# Altium PCB MS3100_DRV_V0.1.PcbDoc
Units mil, origin at the board's own origin, x right, y up, seen from the top; angles counter-clockwise.
Board outline 3947.04 x 6545.46 mil, 2 copper layers (Top Layer, Bottom Layer); 15 components, 14 nets, 46 pads, 3 vias.
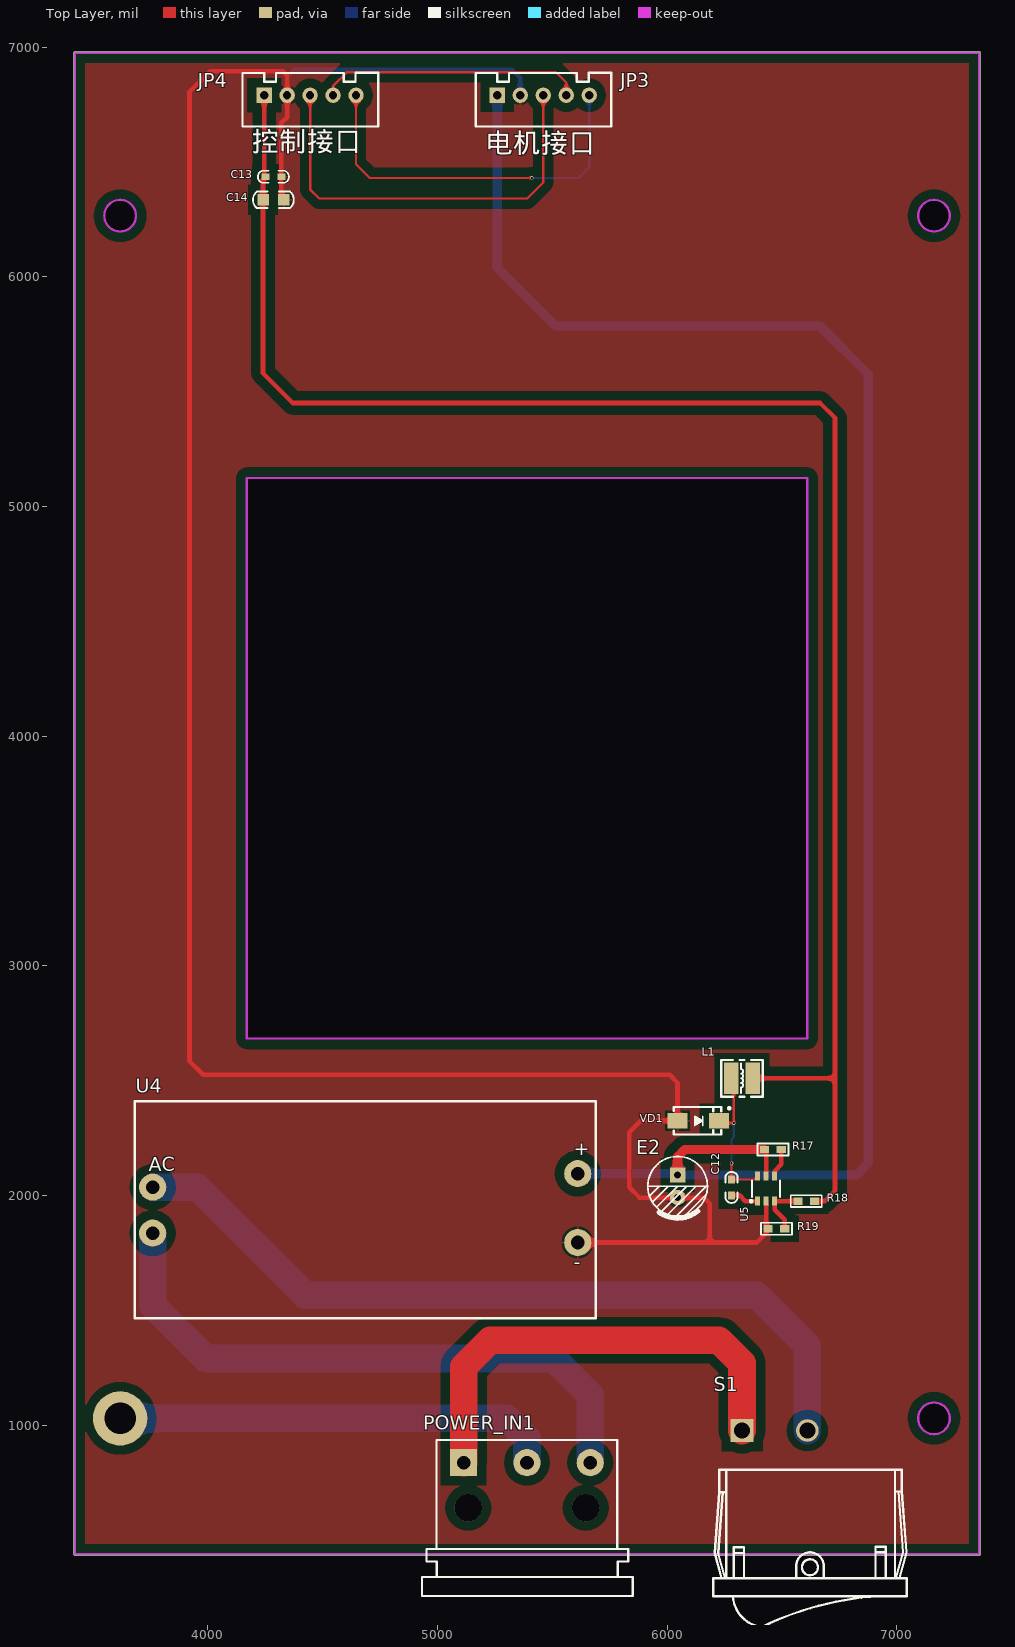
[diagram p0: Top Layer view]
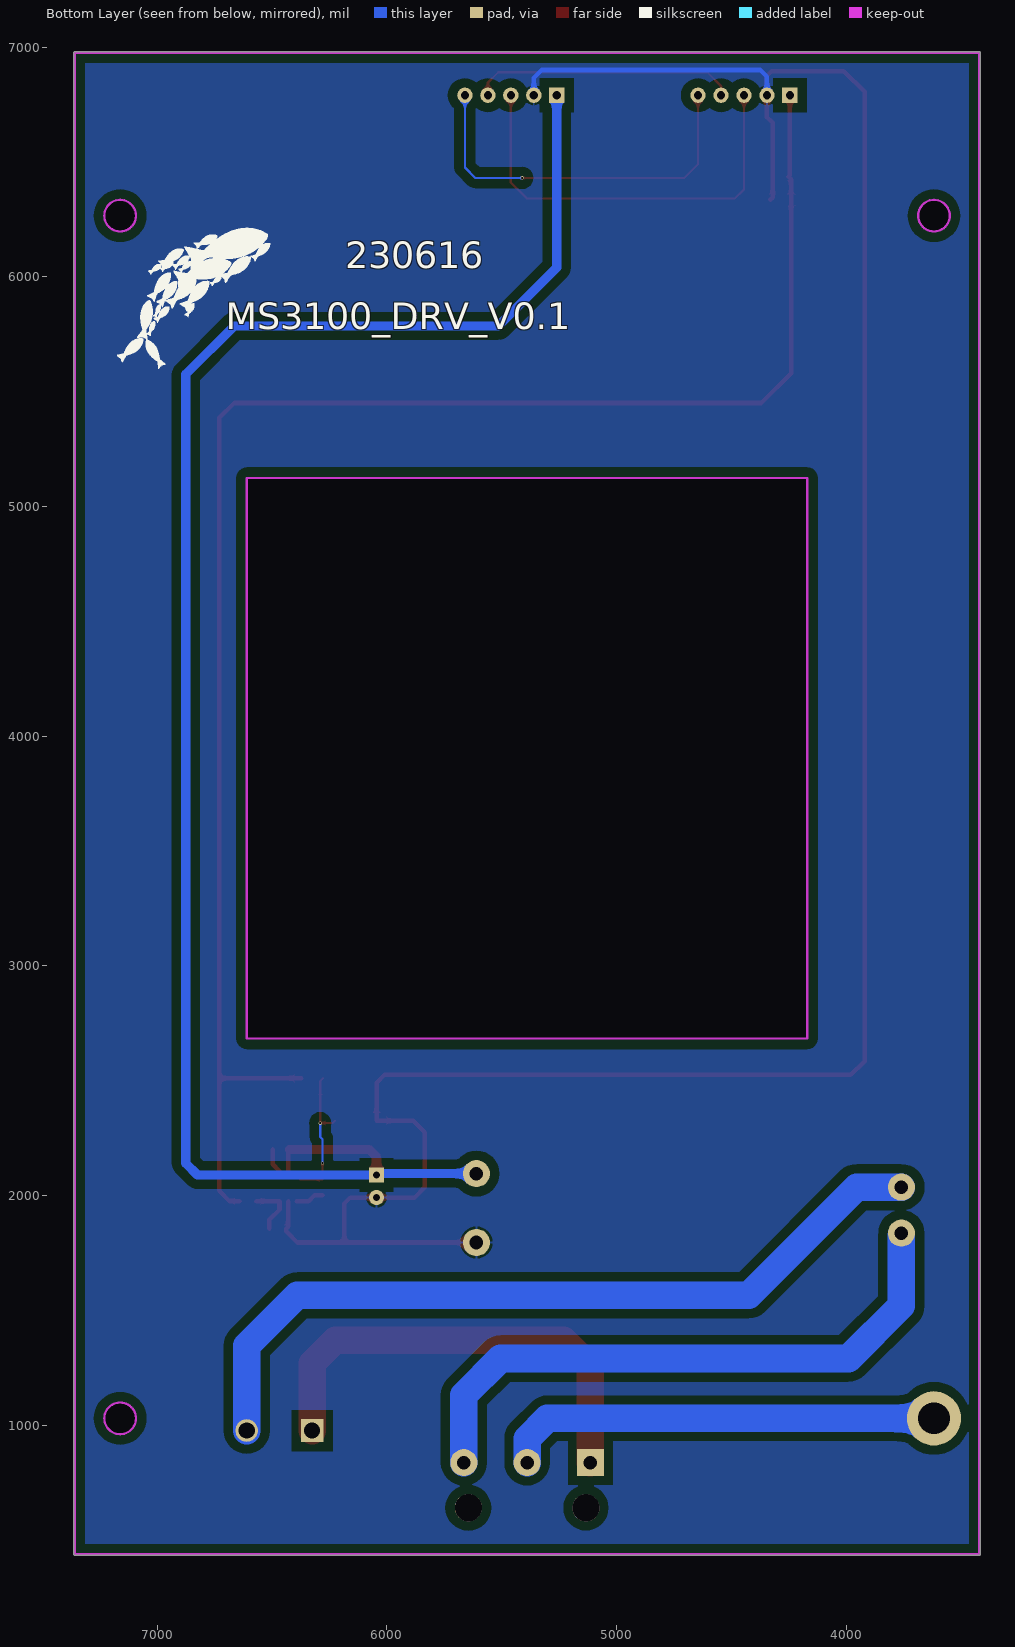
[diagram p1: Bottom Layer view, seen from below]
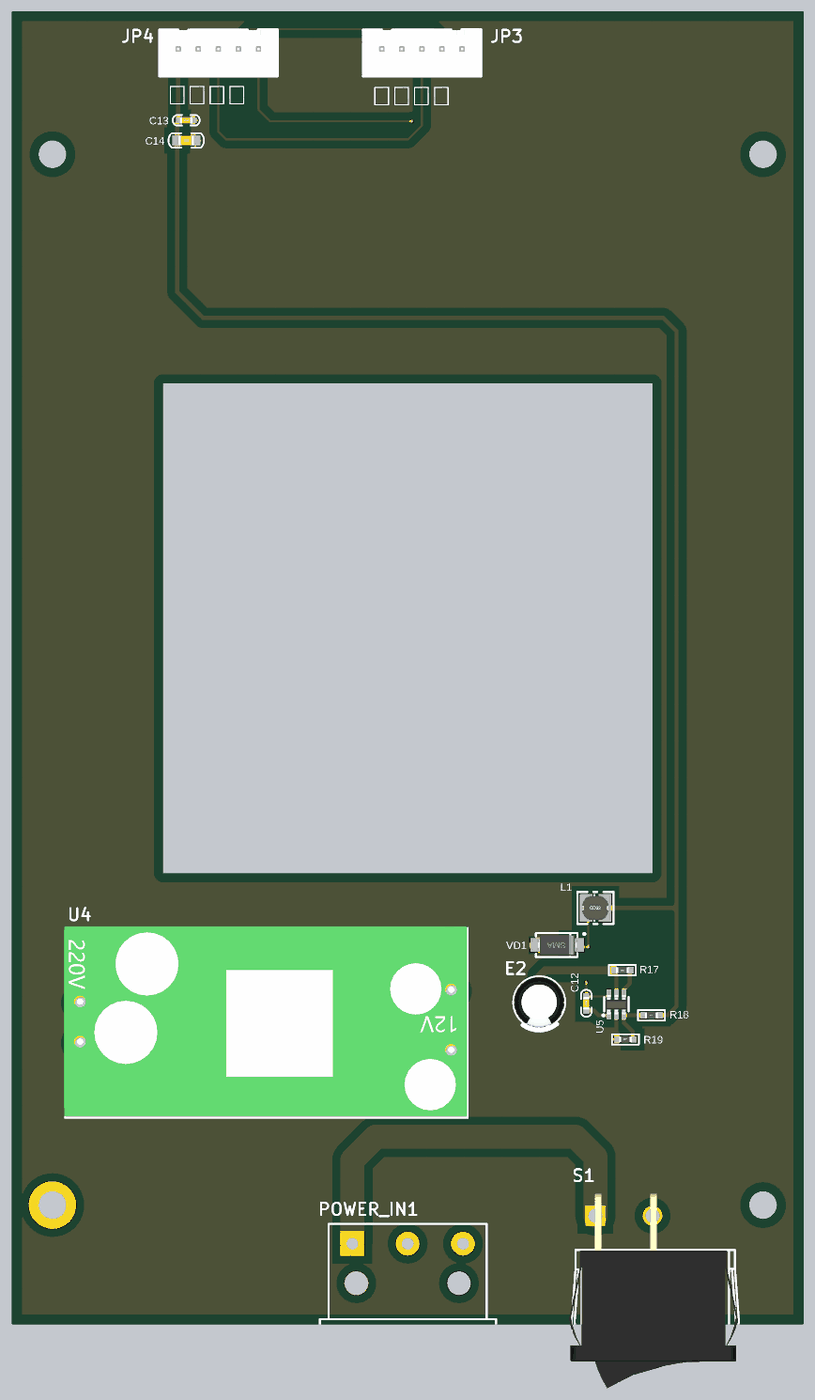
[diagram p2: 3D render of the assembled board from above, using the file's embedded part models]

## Layer stack, top to bottom
Top Solder: solder mask 0.4, Solder Resist, Dk 3.5
Top Layer: signal copper 1.4
Dielectric 1: dielectric 12.6, FR-4, Dk 4.8
Bottom Layer: signal copper 1.4
Bottom Solder: solder mask 0.4, Solder Resist, Dk 3.5

## Board outline
3415.94,438.83 ccw(c3420.95,438.83) 3420.95,433.82 3852.05,433.82 5828.43,433.82 7357.96,433.82 ccw(c7357.96,438.83) 7362.97,438.83 7362.97,6974.27 ccw(c7357.96,6974.27) 7357.96,6979.28 3420.95,6979.28 ccw(c3420.95,6974.27) 3415.94,6974.27
cut-out: 3617.8,6196.71 cw(c3617.8,6265.6) 3548.9,6265.6 cw(c3617.8,6265.6) 3617.8,6334.5 cw(c3617.8,6265.6) 3686.7,6265.6 cw(c3617.8,6265.6)
cut-out: 7092.21,1029.38 ccw(c7161.11,1029.38) 7161.11,960.49 ccw(c7161.11,1029.38) 7230.01,1029.38 ccw(c7161.11,1029.38) 7161.11,1098.28 ccw(c7161.11,1029.38)
cut-out: 7092.21,6265.6 ccw(c7161.11,6265.6) 7161.11,6196.71 ccw(c7161.11,6265.6) 7230.01,6265.6 ccw(c7161.11,6265.6) 7161.11,6334.5 ccw(c7161.11,6265.6)
cut-out: 4168.98,2682.93 6609.93,2682.93 6609.93,5123.87 4168.98,5123.87

## Design rules (kind name [scope] priority, off if disabled: settings)
Clearance [All] p1: gap=10 ignorepadtopadclearanceinfootprint=FALSE
PolygonConnect [All] p1: connectstyle=Relief reliefconductorwidth=10 reliefentries=4 polygonreliefangle="90 Angle" airgapwidth=10
RoutingVias [All] p1: holewidth=28 width=50 viastyle="Through Hole" minholewidth=10 minwidth=10 maxholewidth=28 maxwidth=50
SolderMaskExpansion [All] p1: expansion=4
Width [All] p1: maxlimit=140 minlimit=10 preferedwidth=10
30 further rules are at their usual default settings.

## Components (designator, comment, footprint, x,y, rotation, side; value= is the part's Value field where it differs from the comment)
C12 "0.1uF" "C 0603" 6280,2035 r90 top
C13 "0.1uF" "C 0603" 4285,6435 r180 top
C14 "10uF/16V" "C 0805" 4285,6334.5 r180 top
E2 "220uF/25V" "CAP 2.5*6.3*11.2 - BK" 6045,2040 r270 top
JP3 "HDR-1X5" XH2.54-5P 5260,6790 r0 top locked
JP4 "HDR-1X5" XH2.54-5P 4245,6790 r0 top locked
L1 "4.7uH" CD32 6325.39,2510 r0 top
POWER_IN1 "AC_Power" POWER_M 5113.5,836.85 r0 top locked
R17 "100K" "R 0603" 6460,2200 r180 top
R18 "24K" "R 0603" 6605,1975 r0 top
R19 "7.5K" "R 0603" 6475,1855 r0 top
S1 "SS-12F23" SS11-BBIWJ-R20-R 6200,255 r0 top locked
U4 "AC_To_12V" ACTo12V0.5A 3680.87,1465.08 r0 top
U5 "ME3116AM6G" ME3116AM6G 6430,2030 r90 top
VD1 "SS14" SMA 6135,2325 r0 top

## Footprints (in the part's own frame and the unit in brackets; to place one, negate y for a bottom-side part, rotate by r counter-clockwise, add the part's x,y. Pads: shape width x height; smd on the part's side, far side on the other; paste and mask are expansions set on the pad)
ACTo12V0.5A [mm] "ACת12V-0.5A"
  round 3 hole 1.5: 1(2,14.5) 2(2,9.42) 3(49,16) 4(49,8.38)
  silkscreen extent 0,0 51,24, body extent -0.1,0.19 50.9,24.19, height 16.3
"C 0603" [mil] "无极性贴片电容"
  rect 35x30 smd: 1(-35,0) 2(34,0)
  silkscreen extent -67,-26 67,26, body extent -31,-16 31,16, height 32
"C 0805" [mil] "无极性贴片电容"
  rect 50x50 smd: 1(-45,0) 2(45,0)
  silkscreen extent -89,-36 89,36, body extent -39,-24 39,24, height 20
"CAP 2.5*6.3*11.2 - BK" [mm] "脚距2.5mm直径6.3mm高度11.2mm"
  rect 1.7x1.7 hole 0.8: 1(-1.25,0)
  round 1.7 hole 0.8: 2(1.25,0)
  silkscreen extent -3.3,-3.3 3.56,3.3, body extent -3.15,-3.15 3.16,3.15, height 11.24
CD32 [mm] "3.5*3*2mm（长宽高）"
  rect 1.6x3.5 smd: 1(-1.2,0) 2(1.2,0)
  silkscreen extent -2.29,-2.03 2.29,2.03, body extent -1.71,-1.5 1.71,1.5, height 2.15
ME3116AM6G [mm] "SOT-23-6"
  rect 1x0.55 smd: 1(-1.4,0.95) 2(-1.4,0) 3(-1.4,-0.95) 4(1.4,-0.95) 5(1.4,0) 6(1.4,0.95)
  silkscreen extent -1.52,-1.55 0.9,1.78, body extent -1.27,-1.4 1.16,1.4, height 1.09
POWER_M [mm] "220v电源插座"
  rect 3x3 hole 1.5: 1(0,0)
  round 3 hole 1.5: 2(7,0) 3(14,0)
  round 3 hole 3: 12(0.5,-5)
  round 3 hole 3 unplated: 12(13.5,-5)
  silkscreen extent -4.62,-14.75 18.68,2.5, body extent -4.62,-14.75 18.68,1.91, height 18.22
"R 0603" [mil] "1/10W贴片电阻"
  rect 40x31.5 smd: 1(-36.5,0) 2(36.5,0)
  silkscreen extent -68,-26 68,26, body extent -31,-16 32,16, height 16
SMA [mm] "4.5x2.6*2.2mm（长宽高，不包括引脚）"
  rect 2.2x1.75 smd: 1(-2.3,0) 2(2.3,0)
  silkscreen extent -2.7,-1.52 3.56,1.52, body extent -2.53,-1.3 2.58,1.3, height 2.15
SS11-BBIWJ-R20-R [mm] "船型开关-卧式-2P"
  rect 2.5x2.5 hole 1.8 paste+0 mask+0.051: 2(3.185,18.325)
  round 2.5 hole 1.8 paste+0 mask+0.051: 3(10.415,18.325)
  silkscreen extent 0,-3.4 21.4,14, body extent -0.17,-3.51 21.23,21.09, height 16.8
XH2.54-5P [mm] "接插件，5P"
  rect 1.7x1.7 hole 0.9: 1(0,0)
  round 1.7 hole 0.9: 2(2.54,0) 3(5.08,0) 4(7.62,0) 5(10.16,0)
  silkscreen extent -2.4,-3.45 12.6,2.49, body extent -2.5,-3.3 12.66,2.4, height 7.03

## Part data
C12 C13 C14: library part C, "无极性贴片电容", BOM名称=无极性贴片电容, 学习资源=www.ooocke.com, 版权归属=源创客
E2: library part C-CAP, "直插电解电容", BOM名称=直插电解电容, 学习资源=www.ooocke.com, 版权归属=源创客
JP3 JP4: library part "Header 5", "5P接插件", BOM名称=5P接插件, 学习资源=www.ooocke.com, 版权归属=源创客
L1: library part L, "小功率贴片电感", BOM名称=小功率贴片电感, 学习资源=www.ooocke.com, 版权归属=源创客
POWER_IN1: "AC电源插座"
R17 R18 R19: library part R, "贴片电阻", BOM名称=贴片电阻, 学习资源=www.ooocke.com, 版权归属=源创客
S1: library part SSW-1P, "1路波动开关", BOM名称=波动开关, 学习资源=www.ooocke.com, 版权归属=源创客
U4: "220V转12V降压模块"
U5: "DC-DC电源芯片  24-40V->5V"
VD1: "肖特基二极管"

## Free pads (board coordinates)
  round 236.22 hole 137.8: 2(3617.8,1029.38)

## Via types
v1: diameter 15, hole 10, Top Layer to Bottom Layer, 3 vias

## Nets (pads, with @x,y where several pads share a name; then routed paths per layer and width w, separated by ;. In a path a pad name is that pad's centre, name@x,y a point inside that pad or via, vN(x,y) a via of type N, cw(c..) or ccw(c..) an arc to the next point about the centre after c; other vN are vias at no path point)
3.3V: C13.2 C14.2 JP4.1 L1.2 R18.2 | length 7625.8
  Top Layer w10: JP4.1 JP4.1@4251,6784
  Top Layer w20: JP4.1 4245,6441 C13.2 4240,6424 C14.2 4240,5580 4370,5450 6665,5450 6730,5385 6730,2510 ; L1.2 6730,2510 ; R18.2 6685,1975 6730,2020 6730,2510
12V: E2.1 JP3.1 R17.2 U4.3 U5.5 | length 7869.4
  Top Layer w20: R17.2 6430,2193.5 U5.5
  Top Layer w40: E2.1 6045,2168.5 6076.5,2200 R17.2
  Bottom Layer w40: JP3.1 5260,6040 5515,5785 6665,5785 6875,5575 6875,2140 6824.21,2089.21 E2.1 6039.21,2095 U4.3
DIR: JP3.3 JP4.3 | length 1850.6
  Top Layer w10: JP4.3 4445,6380 4485,6340 5390,6340 5460,6410 JP3.3
EGND: pad.2 POWER_IN1.2 | length 1912
  Bottom Layer w120: pad.2 5300.62,1029.38 5389.09,940.91 POWER_IN1.2
FG: JP3.5 JP4.5 | length 1673.5
  Top Layer w10: JP4.5 4645,6490 4705,6430 v1(5410,6430)
  Bottom Layer w10: v1(5410,6430) 5615,6430 5660,6475 JP3.5
GND: C13.1 C14.1 E2.2 JP3.2 JP4.2 R19.1 U4.4 U5.2 VD1.1 | length 10774.2
  Top Layer w20: C14.1 4320,6344.5 C13.1 4320,6670 4345,6695 JP4.2 4345,6875 4325,6895 4010,6895 3920,6805 3920,2585 3980,2525 6010,2525 6044.45,2490.55 VD1.1 5885,2325 5835,2275 5835,2035 5879.21,1990.79 E2.2 6159.21,1990.79 6185,1965 6185,1795 ; U4.4 6185,1795 ; U5.2 6430,1863.5 R19.1 6438.5,1843.5 6390,1795 6185,1795
  Bottom Layer w20: JP4.2 4345,6870 4375,6900 5325,6900 5360,6865 JP3.2
L: S1.3 U4.1 | length 3505.2
  Bottom Layer w120: U4.1 3954.06,2035.94 4425,1565 6390,1565 6610.04,1344.96 S1.3
L_IN: POWER_IN1.1 S1.2 | length 2011.5
  Top Layer w120: POWER_IN1.1 5113.5,1253.5 5230,1370 6225,1370 6325.39,1269.61 S1.2
N: POWER_IN1.3 U4.2 | length 2665
  Bottom Layer w120: U4.2@3760,1825.39 3760,1520 3990,1290 5505,1290 5664.69,1130.31 POWER_IN1.3
NetC12_1: C12.1 U5.1 | length 123
  Top Layer w20: C12.1 6315,2000 6340.12,1974.88 U5.1
NetC12_2: C12.2 L1.1 U5.6 VD1.2 | length 637.9
  Top Layer w10: VD1.2 6235.55,2315 v1(6290,2315) 6290,2498.15 L1.1 ; v1(6280,2140) C12.2 6376.48,2069 U5.6
  Bottom Layer w10: v1(6280,2140) 6280,2245 6290,2255 v1(6290,2315)
NetR17_1: R17.1 U5.4 | length 126.9
  Top Layer w20: U5.4 6467.4,2105.9 6496.5,2135 R17.1
NetR18_1: R18.1 R19.2 U5.3 | length 239.3
  Top Layer w20: R19.2 6511.5,1893.5 6467.4,1937.6 U5.3 6467.52,1975 R18.1
PWM: JP3.4 JP4.4 | length 1153.5
  Top Layer w10: JP4.4 4545,6830 4605,6890 5515,6890 5560,6845 JP3.4
pads on no net: POWER_IN1.12

## Polygon pours and split planes (outlines as drawn)
GND on Top Layer "GND_L01_P000" (solid, remove dead copper, pour order 0): 3415.94,438.83 ccw(c3420.95,438.83) 3420.95,433.82 3852.05,433.82 5828.43,433.82 7357.96,433.82 ccw(c7357.96,438.83) 7362.97,438.83 7362.97,6974.27 ccw(c7357.96,6974.27) 7357.96,6979.28 3420.95,6979.28 ccw(c3420.95,6974.27) 3415.94,6974.27
GND on Bottom Layer "Top Layer-No Net" (solid, remove dead copper, pour order 1): 3415.94,438.83 ccw(c3420.95,438.83) 3420.95,433.82 3852.05,433.82 5828.43,433.82 7357.96,433.82 ccw(c7357.96,438.83) 7362.97,438.83 7362.97,6974.27 ccw(c7357.96,6974.27) 7357.96,6979.28 3420.95,6979.28 ccw(c3420.95,6974.27) 3415.94,6974.27

## Keep-outs
Keep-Out Layer:
  circle w10: c7161.11,6265.6 r68.9
  circle w10: c7161.11,1029.38 r68.9
  circle w10: c3617.8,6265.6 r68.9
  lines w10: 7019.31,438.83 7357.96,438.83 7357.96,6974.27 3420.95,6974.27 3420.95,438.83 3852.05,438.83 5828.43,438.83 7140,438.83 ; 4168.98,2682.93 6609.93,2682.93 6609.93,5123.87 4168.98,5123.87 4168.98,2682.93

## Silkscreen, mask and mechanical layers (free items; w line width, h text height)
Top Overlay:
  text "控制接口" at 4190,6515 h150
  text "电机接口" at 5210,6510 h150
Bottom Overlay:
  drawing of 2012 lines, arcs and shapes, not listed
  text "230616" at 6180.22,5998 h200
  text "MS3100_DRV_V0.1" at 6700.39,5733 h200

## Text inside footprints (layer, text, board x,y; h text height)
U4: Top Overlay "AC" at 3741.76,2105.44 h60; Top Overlay "-" at 5591.76,1680.44 h60; Top Overlay "+" at 5591.76,2175.08 h60